# EAGLE board Adjustable Output Voltage Regulator using 7805 (EAGLE 7.6.0)

Size 56.82 x 53.33 mm. Coordinates in mm from the lower left corner, seen from the top.
Outline: 0,0 56.82,0 56.82,53.33 0,53.33 0,0
Copper layers (1*16): Top 0.035mm / dielectric 1.5mm / Bottom 0.035mm
Design rules "default": minimum track width 10mil, minimum drill 24mil, track to track 8mil, track to pad 8mil, pad to pad 8mil, via to via 8mil, smd to smd 8mil, copper to edge 40mil, drill to drill 8mil, minimum pad ring 10mil, minimum via ring 8mil, stop-mask expansion 4mil, vias tented up to drill 0mil, thermal gap 10mil

## Footprints (pad centres in the part's own frame; a part is rotated, then mirrored left to right if it is on the bottom)
DC-POWER = drill 0.889 pad 2.54 octagon: + 0,2.54; - 0,-2.54
C5B2.5 = drill 0.813 pad 1.6 octagon: 1 -2.54,0; 2 2.54,0
0207/10 = drill 0.813 octagon: 1 -5.08,0; 2 5.08,0
TO220 = drill 1.118 long: 1 -2.54,-6.35; 2 0,-6.35; 3 2.54,-6.35 | hole 3.302: 0,11.176

## Placement (x,y rotation side)
BAT1  [DC-POWER]  5,10.08 0 top
C1  0.1uF  [C5B2.5]  5,60.88 0 top  (outside the outline)
C2  0.33uF  [C5B2.5]  5,73.58 0 top  (outside the outline)
Meter3  [DC-POWER]  5,86.28 0 top  (outside the outline)
R1  0  [0207/10]  5,22.78 0 top
R2  420‎Ω  [0207/10]  5,35.48 0 top
U1  [TO220]  5,48.18 0 top

## Library data of the parts
BAT1 C1 C2 Meter3 R1 R2 U1 = AUTODESK_CIRCUITS_BREADBOARD

## Nets
N$1: C1.1 Meter3.+ R2.1 U1.3
N$2: R1.2 R2.2 U1.2
N$3: BAT1.+ C2.2 U1.1
N$4: BAT1.- C1.2 C2.1 Meter3.- R1.1

## Tracks (layer width: path | path; a pad name or v marks a point on that pad's centre or on a via)
N$1  (3 unrouted)
N$2  (2 unrouted)
N$3  (2 unrouted)
N$4  (4 unrouted)